# Altium PCB PCB1.PcbDoc (part 1 of 2)
Units mm, origin at the board's own origin, x right, y up, seen from the top; angles counter-clockwise.
Board outline 103.25 x 34.25 mm, 2 copper layers (Top Layer, Bottom Layer); 292 components, 18 nets, 632 pads, 262 vias.
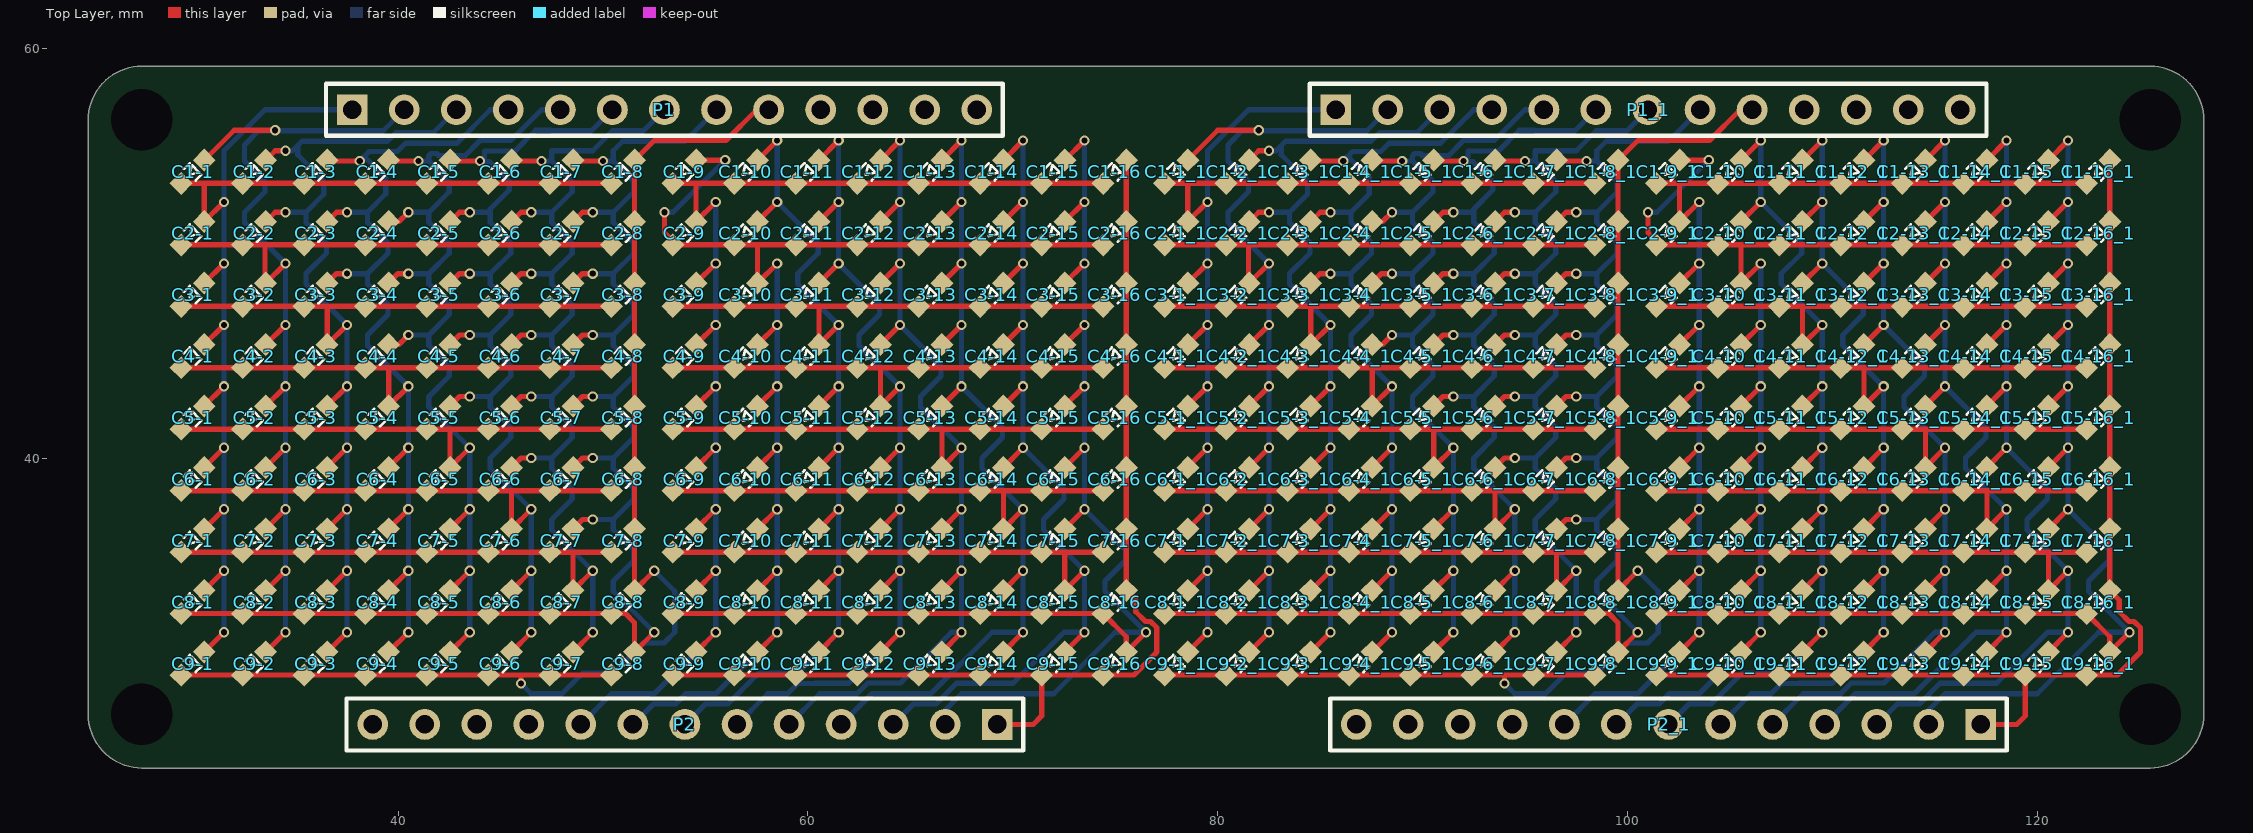
[diagram p0: Top Layer view]
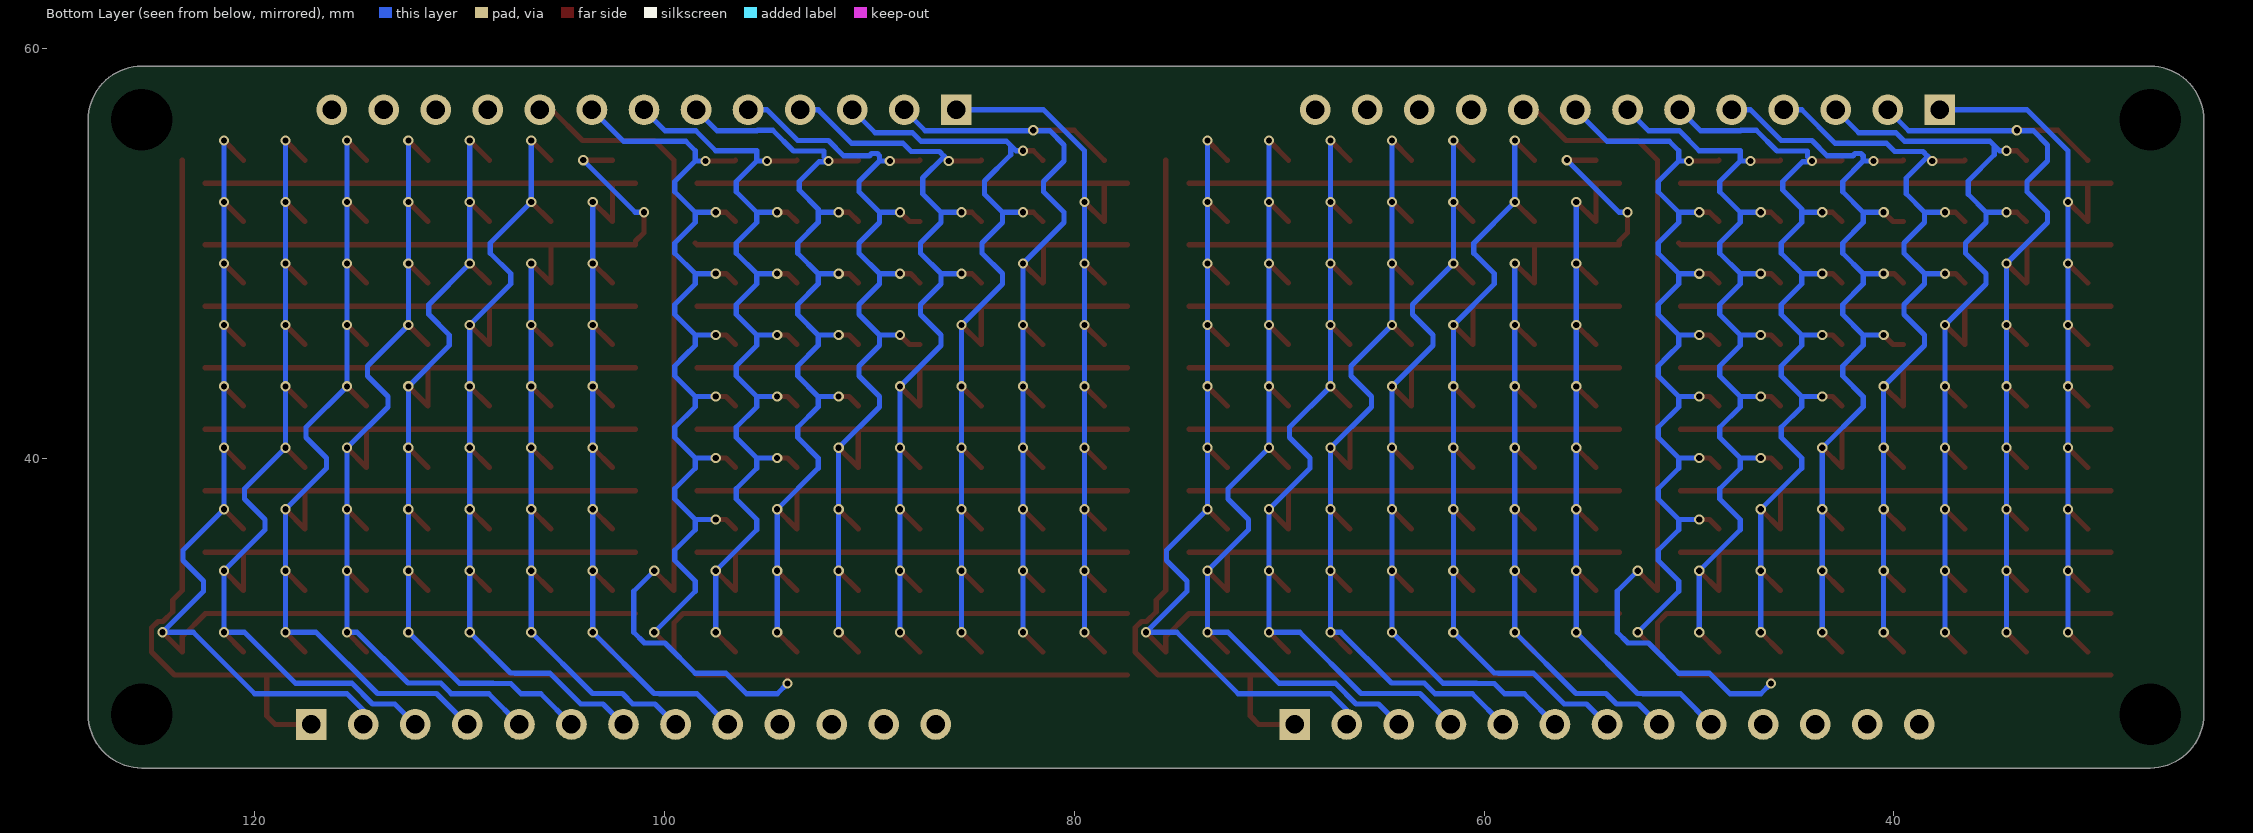
[diagram p1: Bottom Layer view, seen from below]

## Layer stack, top to bottom
Top Solder: solder mask 0.0102, Solder Resist, Dk 3.5
Top Layer: signal copper 0.0356
Dielectric 1: dielectric 0.32, FR-4, Dk 4.8
Bottom Layer: signal copper 0.0356
Bottom Solder: solder mask 0.0102, Solder Resist, Dk 3.5

## Board outline
24.873,27.5 24.873,56.5 cw(c27.5,56.5) 27.5,59.127 125.5,59.127 cw(c125.5,56.5) 128.127,56.5 128.127,27.5 cw(c125.5,27.5) 125.5,24.873 27.5,24.873 cw(c27.5,27.5)

## Design rules (kind name [scope] priority, off if disabled: settings)
Clearance [All] p1: gap=0.152 ignorepadtopadclearanceinfootprint=FALSE except(0: Arc-Hole Track-Hole SMDPad-Hole THPad-Hole Via-Hole Fill-Hole Poly-Hole Region-Hole Text-Hole; 0.254: Arc-Arc Arc-Track Track-Track)
ComponentClearance [All] p1: gap=0 collisioncheckmode=3 verticalgap=0.254 showdistances=FALSE
PolygonConnect [All] p1: connectstyle=Relief reliefconductorwidth=0.254 reliefentries=4 polygonreliefangle="90 Angle" airgapwidth=0.254
RoutingVias [All] p1: holewidth=0.3 width=0.5 viastyle="Through Hole" minholewidth=0.3 minwidth=0.5 maxholewidth=0.3 maxwidth=0.5
SolderMaskExpansion [All] p1: expansion=0.102
Width [All] p1: maxlimit=0.254 minlimit=0.254 preferedwidth=0.254
29 further rules are at their usual default settings.

## Classes and differential pairs
component class Sheet1: C1-1 C1-2 C1-3 C1-4 C1-5 C1-6 C1-7 C1-8 C1-9 C1-10 C1-11 C1-12 C1-13 C1-14 C1-15 C1-16 C2-1 C2-2 C2-3 C2-4 C2-5 C2-6 C2-7 C2-8 C2-9 C2-10 C2-11 C2-12 C2-13 C2-14 C2-15 C2-16 C3-1 C3-2 C3-3 C3-4 C3-5 C3-6 C3-7 C3-8 C3-9 C3-10 C3-11 C3-12 C3-13 C3-14 C3-15 C3-16 C4-1 C4-2 C4-3 C4-4 C4-5 C4-6 C4-7 C4-8 C4-9 C4-10 C4-11 C4-12 C4-13 C4-14 C4-15 C4-16 C5-1 C5-2 C5-3 C5-4 C5-5 C5-6 C5-7 C5-8 C5-9 C5-10 C5-11 C5-12 C5-13 C5-14 C5-15 C5-16 C6-1 C6-2 C6-3 C6-4 C6-5 C6-6 C6-7 C6-8 C6-9 C6-10 C6-11 C6-12 C6-13 C6-14 C6-15 C6-16 C7-1 C7-2 C7-3 C7-4 C7-5 C7-6 C7-7 C7-8 C7-9 C7-10 C7-11 C7-12 C7-13 C7-14 C7-15 C7-16 C8-1 C8-2 C8-3 C8-4 C8-5 C8-6 C8-7 C8-8 C8-9 C8-10 C8-11 C8-12 C8-13 C8-14 C8-15 C8-16 C9-1 C9-2 C9-3 C9-4 C9-5 C9-6 C9-7 C9-8 C9-9 C9-10 C9-11 C9-12 C9-13 C9-14 C9-15 C9-16 P1 P2

## Components (designator, comment, footprint, x,y, rotation, side; value= is the part's Value field where it differs from the comment)
C1-1 "LED" "LED 0603(2)" 30,54 r225 bottom
C1-1_1 "LED" "LED 0603(2)" 78,54 r225 bottom (schematic designator C1-1)
C1-2 "LED" "LED 0603(2)" 33,54 r225 bottom
C1-2_1 "LED" "LED 0603(2)" 81,54 r225 bottom (schematic designator C1-2)
C1-3 "LED" "LED 0603(2)" 36,54 r225 bottom
C1-3_1 "LED" "LED 0603(2)" 84,54 r225 bottom (schematic designator C1-3)
C1-4 "LED" "LED 0603(2)" 39,54 r225 bottom
C1-4_1 "LED" "LED 0603(2)" 87,54 r225 bottom (schematic designator C1-4)
C1-5 "LED" "LED 0603(2)" 42,54 r225 bottom
C1-5_1 "LED" "LED 0603(2)" 90,54 r225 bottom (schematic designator C1-5)
C1-6 "LED" "LED 0603(2)" 45,54 r225 bottom
C1-6_1 "LED" "LED 0603(2)" 93,54 r225 bottom (schematic designator C1-6)
C1-7 "LED" "LED 0603(2)" 48,54 r225 bottom
C1-7_1 "LED" "LED 0603(2)" 96,54 r225 bottom (schematic designator C1-7)
C1-8 "LED" "LED 0603(2)" 51,54 r225 bottom
C1-8_1 "LED" "LED 0603(2)" 99,54 r225 bottom (schematic designator C1-8)
C1-9 "LED" "LED 0603(2)" 54,54 r225 bottom
C1-9_1 "LED" "LED 0603(2)" 102,54 r225 bottom (schematic designator C1-9)
C1-10 "LED" "LED 0603(2)" 57,54 r225 bottom
C1-10_1 "LED" "LED 0603(2)" 105,54 r225 bottom (schematic designator C1-10)
C1-11 "LED" "LED 0603(2)" 60,54 r225 bottom
C1-11_1 "LED" "LED 0603(2)" 108,54 r225 bottom (schematic designator C1-11)
C1-12 "LED" "LED 0603(2)" 63,54 r225 bottom
C1-12_1 "LED" "LED 0603(2)" 111,54 r225 bottom (schematic designator C1-12)
C1-13 "LED" "LED 0603(2)" 66,54 r225 bottom
C1-13_1 "LED" "LED 0603(2)" 114,54 r225 bottom (schematic designator C1-13)
C1-14 "LED" "LED 0603(2)" 69,54 r225 bottom
C1-14_1 "LED" "LED 0603(2)" 117,54 r225 bottom (schematic designator C1-14)
C1-15 "LED" "LED 0603(2)" 72,54 r225 bottom
C1-15_1 "LED" "LED 0603(2)" 120,54 r225 bottom (schematic designator C1-15)
C1-16 "LED" "LED 0603(2)" 75,54 r225 bottom
C1-16_1 "LED" "LED 0603(2)" 123,54 r225 bottom (schematic designator C1-16)
C2-1 "LED" "LED 0603(2)" 30,51 r225 bottom
C2-1_1 "LED" "LED 0603(2)" 78,51 r225 bottom (schematic designator C2-1)
C2-2 "LED" "LED 0603(2)" 33,51 r225 bottom
C2-2_1 "LED" "LED 0603(2)" 81,51 r225 bottom (schematic designator C2-2)
C2-3 "LED" "LED 0603(2)" 36,51 r225 bottom
C2-3_1 "LED" "LED 0603(2)" 84,51 r225 bottom (schematic designator C2-3)
C2-4 "LED" "LED 0603(2)" 39,51 r225 bottom
C2-4_1 "LED" "LED 0603(2)" 87,51 r225 bottom (schematic designator C2-4)
C2-5 "LED" "LED 0603(2)" 42,51 r225 bottom
C2-5_1 "LED" "LED 0603(2)" 90,51 r225 bottom (schematic designator C2-5)
C2-6 "LED" "LED 0603(2)" 45,51 r225 bottom
C2-6_1 "LED" "LED 0603(2)" 93,51 r225 bottom (schematic designator C2-6)
C2-7 "LED" "LED 0603(2)" 48,51 r225 bottom
C2-7_1 "LED" "LED 0603(2)" 96,51 r225 bottom (schematic designator C2-7)
C2-8 "LED" "LED 0603(2)" 51,51 r225 bottom
C2-8_1 "LED" "LED 0603(2)" 99,51 r225 bottom (schematic designator C2-8)
C2-9 "LED" "LED 0603(2)" 54,51 r225 bottom
C2-9_1 "LED" "LED 0603(2)" 102,51 r225 bottom (schematic designator C2-9)
C2-10 "LED" "LED 0603(2)" 57,51 r225 bottom
C2-10_1 "LED" "LED 0603(2)" 105,51 r225 bottom (schematic designator C2-10)
C2-11 "LED" "LED 0603(2)" 60,51 r225 bottom
C2-11_1 "LED" "LED 0603(2)" 108,51 r225 bottom (schematic designator C2-11)
C2-12 "LED" "LED 0603(2)" 63,51 r225 bottom
C2-12_1 "LED" "LED 0603(2)" 111,51 r225 bottom (schematic designator C2-12)
C2-13 "LED" "LED 0603(2)" 66,51 r225 bottom
C2-13_1 "LED" "LED 0603(2)" 114,51 r225 bottom (schematic designator C2-13)
C2-14 "LED" "LED 0603(2)" 69,51 r225 bottom
C2-14_1 "LED" "LED 0603(2)" 117,51 r225 bottom (schematic designator C2-14)
C2-15 "LED" "LED 0603(2)" 72,51 r225 bottom
C2-15_1 "LED" "LED 0603(2)" 120,51 r225 bottom (schematic designator C2-15)
C2-16 "LED" "LED 0603(2)" 75,51 r225 bottom
C2-16_1 "LED" "LED 0603(2)" 123,51 r225 bottom (schematic designator C2-16)
C3-1 "LED" "LED 0603(2)" 30,48 r225 bottom
C3-1_1 "LED" "LED 0603(2)" 78,48 r225 bottom (schematic designator C3-1)
C3-2 "LED" "LED 0603(2)" 33,48 r225 bottom
C3-2_1 "LED" "LED 0603(2)" 81,48 r225 bottom (schematic designator C3-2)
C3-3 "LED" "LED 0603(2)" 36,48 r225 bottom
C3-3_1 "LED" "LED 0603(2)" 84,48 r225 bottom (schematic designator C3-3)
C3-4 "LED" "LED 0603(2)" 39,48 r225 bottom
C3-4_1 "LED" "LED 0603(2)" 87,48 r225 bottom (schematic designator C3-4)
C3-5 "LED" "LED 0603(2)" 42,48 r225 bottom
C3-5_1 "LED" "LED 0603(2)" 90,48 r225 bottom (schematic designator C3-5)
C3-6 "LED" "LED 0603(2)" 45,48 r225 bottom
C3-6_1 "LED" "LED 0603(2)" 93,48 r225 bottom (schematic designator C3-6)
C3-7 "LED" "LED 0603(2)" 48,48 r225 bottom
C3-7_1 "LED" "LED 0603(2)" 96,48 r225 bottom (schematic designator C3-7)
C3-8 "LED" "LED 0603(2)" 51,48 r225 bottom
C3-8_1 "LED" "LED 0603(2)" 99,48 r225 bottom (schematic designator C3-8)
C3-9 "LED" "LED 0603(2)" 54,48 r225 bottom
C3-9_1 "LED" "LED 0603(2)" 102,48 r225 bottom (schematic designator C3-9)
C3-10 "LED" "LED 0603(2)" 57,48 r225 bottom
C3-10_1 "LED" "LED 0603(2)" 105,48 r225 bottom (schematic designator C3-10)
C3-11 "LED" "LED 0603(2)" 60,48 r225 bottom
C3-11_1 "LED" "LED 0603(2)" 108,48 r225 bottom (schematic designator C3-11)
C3-12 "LED" "LED 0603(2)" 63,48 r225 bottom
C3-12_1 "LED" "LED 0603(2)" 111,48 r225 bottom (schematic designator C3-12)
C3-13 "LED" "LED 0603(2)" 66,48 r225 bottom
C3-13_1 "LED" "LED 0603(2)" 114,48 r225 bottom (schematic designator C3-13)
C3-14 "LED" "LED 0603(2)" 69,48 r225 bottom
C3-14_1 "LED" "LED 0603(2)" 117,48 r225 bottom (schematic designator C3-14)
C3-15 "LED" "LED 0603(2)" 72,48 r225 bottom
C3-15_1 "LED" "LED 0603(2)" 120,48 r225 bottom (schematic designator C3-15)
C3-16 "LED" "LED 0603(2)" 75,48 r225 bottom
C3-16_1 "LED" "LED 0603(2)" 123,48 r225 bottom (schematic designator C3-16)
C4-1 "LED" "LED 0603(2)" 30,45 r225 bottom
C4-1_1 "LED" "LED 0603(2)" 78,45 r225 bottom (schematic designator C4-1)
C4-2 "LED" "LED 0603(2)" 33,45 r225 bottom
C4-2_1 "LED" "LED 0603(2)" 81,45 r225 bottom (schematic designator C4-2)
C4-3 "LED" "LED 0603(2)" 36,45 r225 bottom
C4-3_1 "LED" "LED 0603(2)" 84,45 r225 bottom (schematic designator C4-3)
C4-4 "LED" "LED 0603(2)" 39,45 r225 bottom
C4-4_1 "LED" "LED 0603(2)" 87,45 r225 bottom (schematic designator C4-4)
C4-5 "LED" "LED 0603(2)" 42,45 r225 bottom
C4-5_1 "LED" "LED 0603(2)" 90,45 r225 bottom (schematic designator C4-5)
C4-6 "LED" "LED 0603(2)" 45,45 r225 bottom
C4-6_1 "LED" "LED 0603(2)" 93,45 r225 bottom (schematic designator C4-6)
C4-7 "LED" "LED 0603(2)" 48,45 r225 bottom
C4-7_1 "LED" "LED 0603(2)" 96,45 r225 bottom (schematic designator C4-7)
C4-8 "LED" "LED 0603(2)" 51,45 r225 bottom
C4-8_1 "LED" "LED 0603(2)" 99,45 r225 bottom (schematic designator C4-8)
C4-9 "LED" "LED 0603(2)" 54,45 r225 bottom
C4-9_1 "LED" "LED 0603(2)" 102,45 r225 bottom (schematic designator C4-9)
C4-10 "LED" "LED 0603(2)" 57,45 r225 bottom
C4-10_1 "LED" "LED 0603(2)" 105,45 r225 bottom (schematic designator C4-10)
C4-11 "LED" "LED 0603(2)" 60,45 r225 bottom
C4-11_1 "LED" "LED 0603(2)" 108,45 r225 bottom (schematic designator C4-11)
C4-12 "LED" "LED 0603(2)" 63,45 r225 bottom
C4-12_1 "LED" "LED 0603(2)" 111,45 r225 bottom (schematic designator C4-12)
C4-13 "LED" "LED 0603(2)" 66,45 r225 bottom
C4-13_1 "LED" "LED 0603(2)" 114,45 r225 bottom (schematic designator C4-13)
C4-14 "LED" "LED 0603(2)" 69,45 r225 bottom
C4-14_1 "LED" "LED 0603(2)" 117,45 r225 bottom (schematic designator C4-14)
C4-15 "LED" "LED 0603(2)" 72,45 r225 bottom
C4-15_1 "LED" "LED 0603(2)" 120,45 r225 bottom (schematic designator C4-15)
C4-16 "LED" "LED 0603(2)" 75,45 r225 bottom
C4-16_1 "LED" "LED 0603(2)" 123,45 r225 bottom (schematic designator C4-16)
C5-1 "LED" "LED 0603(2)" 30,42 r225 bottom
C5-1_1 "LED" "LED 0603(2)" 78,42 r225 bottom (schematic designator C5-1)
C5-2 "LED" "LED 0603(2)" 33,42 r225 bottom
C5-2_1 "LED" "LED 0603(2)" 81,42 r225 bottom (schematic designator C5-2)
C5-3 "LED" "LED 0603(2)" 36,42 r225 bottom
C5-3_1 "LED" "LED 0603(2)" 84,42 r225 bottom (schematic designator C5-3)
C5-4 "LED" "LED 0603(2)" 39,42 r225 bottom
C5-4_1 "LED" "LED 0603(2)" 87,42 r225 bottom (schematic designator C5-4)
C5-5 "LED" "LED 0603(2)" 42,42 r225 bottom
C5-5_1 "LED" "LED 0603(2)" 90,42 r225 bottom (schematic designator C5-5)
C5-6 "LED" "LED 0603(2)" 45,42 r225 bottom
C5-6_1 "LED" "LED 0603(2)" 93,42 r225 bottom (schematic designator C5-6)
C5-7 "LED" "LED 0603(2)" 48,42 r225 bottom
C5-7_1 "LED" "LED 0603(2)" 96,42 r225 bottom (schematic designator C5-7)
C5-8 "LED" "LED 0603(2)" 51,42 r225 bottom
C5-8_1 "LED" "LED 0603(2)" 99,42 r225 bottom (schematic designator C5-8)
C5-9 "LED" "LED 0603(2)" 54,42 r225 bottom
C5-9_1 "LED" "LED 0603(2)" 102,42 r225 bottom (schematic designator C5-9)
C5-10 "LED" "LED 0603(2)" 57,42 r225 bottom
C5-10_1 "LED" "LED 0603(2)" 105,42 r225 bottom (schematic designator C5-10)
C5-11 "LED" "LED 0603(2)" 60,42 r225 bottom
C5-11_1 "LED" "LED 0603(2)" 108,42 r225 bottom (schematic designator C5-11)
C5-12 "LED" "LED 0603(2)" 63,42 r225 bottom
C5-12_1 "LED" "LED 0603(2)" 111,42 r225 bottom (schematic designator C5-12)
C5-13 "LED" "LED 0603(2)" 66,42 r225 bottom
C5-13_1 "LED" "LED 0603(2)" 114,42 r225 bottom (schematic designator C5-13)
C5-14 "LED" "LED 0603(2)" 69,42 r225 bottom
C5-14_1 "LED" "LED 0603(2)" 117,42 r225 bottom (schematic designator C5-14)
C5-15 "LED" "LED 0603(2)" 72,42 r225 bottom
C5-15_1 "LED" "LED 0603(2)" 120,42 r225 bottom (schematic designator C5-15)
C5-16 "LED" "LED 0603(2)" 75,42 r225 bottom
C5-16_1 "LED" "LED 0603(2)" 123,42 r225 bottom (schematic designator C5-16)
C6-1 "LED" "LED 0603(2)" 30,39 r225 bottom
C6-1_1 "LED" "LED 0603(2)" 78,39 r225 bottom (schematic designator C6-1)
C6-2 "LED" "LED 0603(2)" 33,39 r225 bottom
C6-2_1 "LED" "LED 0603(2)" 81,39 r225 bottom (schematic designator C6-2)
C6-3 "LED" "LED 0603(2)" 36,39 r225 bottom
C6-3_1 "LED" "LED 0603(2)" 84,39 r225 bottom (schematic designator C6-3)
C6-4 "LED" "LED 0603(2)" 39,39 r225 bottom
C6-4_1 "LED" "LED 0603(2)" 87,39 r225 bottom (schematic designator C6-4)
C6-5 "LED" "LED 0603(2)" 42,39 r225 bottom
C6-5_1 "LED" "LED 0603(2)" 90,39 r225 bottom (schematic designator C6-5)
C6-6 "LED" "LED 0603(2)" 45,39 r225 bottom
C6-6_1 "LED" "LED 0603(2)" 93,39 r225 bottom (schematic designator C6-6)
C6-7 "LED" "LED 0603(2)" 48,39 r225 bottom
C6-7_1 "LED" "LED 0603(2)" 96,39 r225 bottom (schematic designator C6-7)
C6-8 "LED" "LED 0603(2)" 51,39 r225 bottom
C6-8_1 "LED" "LED 0603(2)" 99,39 r225 bottom (schematic designator C6-8)
C6-9 "LED" "LED 0603(2)" 54,39 r225 bottom
C6-9_1 "LED" "LED 0603(2)" 102,39 r225 bottom (schematic designator C6-9)
C6-10 "LED" "LED 0603(2)" 57,39 r225 bottom
C6-10_1 "LED" "LED 0603(2)" 105,39 r225 bottom (schematic designator C6-10)
C6-11 "LED" "LED 0603(2)" 60,39 r225 bottom
C6-11_1 "LED" "LED 0603(2)" 108,39 r225 bottom (schematic designator C6-11)
C6-12 "LED" "LED 0603(2)" 63,39 r225 bottom
C6-12_1 "LED" "LED 0603(2)" 111,39 r225 bottom (schematic designator C6-12)
C6-13 "LED" "LED 0603(2)" 66,39 r225 bottom
C6-13_1 "LED" "LED 0603(2)" 114,39 r225 bottom (schematic designator C6-13)
C6-14 "LED" "LED 0603(2)" 69,39 r225 bottom
C6-14_1 "LED" "LED 0603(2)" 117,39 r225 bottom (schematic designator C6-14)
C6-15 "LED" "LED 0603(2)" 72,39 r225 bottom
C6-15_1 "LED" "LED 0603(2)" 120,39 r225 bottom (schematic designator C6-15)
C6-16 "LED" "LED 0603(2)" 75,39 r225 bottom
C6-16_1 "LED" "LED 0603(2)" 123,39 r225 bottom (schematic designator C6-16)
C7-1 "LED" "LED 0603(2)" 30,36 r225 bottom
C7-1_1 "LED" "LED 0603(2)" 78,36 r225 bottom (schematic designator C7-1)
C7-2 "LED" "LED 0603(2)" 33,36 r225 bottom
C7-2_1 "LED" "LED 0603(2)" 81,36 r225 bottom (schematic designator C7-2)
C7-3 "LED" "LED 0603(2)" 36,36 r225 bottom
C7-3_1 "LED" "LED 0603(2)" 84,36 r225 bottom (schematic designator C7-3)
C7-4 "LED" "LED 0603(2)" 39,36 r225 bottom
C7-4_1 "LED" "LED 0603(2)" 87,36 r225 bottom (schematic designator C7-4)
C7-5 "LED" "LED 0603(2)" 42,36 r225 bottom
C7-5_1 "LED" "LED 0603(2)" 90,36 r225 bottom (schematic designator C7-5)
C7-6 "LED" "LED 0603(2)" 45,36 r225 bottom
C7-6_1 "LED" "LED 0603(2)" 93,36 r225 bottom (schematic designator C7-6)
C7-7 "LED" "LED 0603(2)" 48,36 r225 bottom
C7-7_1 "LED" "LED 0603(2)" 96,36 r225 bottom (schematic designator C7-7)
C7-8 "LED" "LED 0603(2)" 51,36 r225 bottom
C7-8_1 "LED" "LED 0603(2)" 99,36 r225 bottom (schematic designator C7-8)
C7-9 "LED" "LED 0603(2)" 54,36 r225 bottom
C7-9_1 "LED" "LED 0603(2)" 102,36 r225 bottom (schematic designator C7-9)
C7-10 "LED" "LED 0603(2)" 57,36 r225 bottom
C7-10_1 "LED" "LED 0603(2)" 105,36 r225 bottom (schematic designator C7-10)
C7-11 "LED" "LED 0603(2)" 60,36 r225 bottom
C7-11_1 "LED" "LED 0603(2)" 108,36 r225 bottom (schematic designator C7-11)
C7-12 "LED" "LED 0603(2)" 63,36 r225 bottom
C7-12_1 "LED" "LED 0603(2)" 111,36 r225 bottom (schematic designator C7-12)
C7-13 "LED" "LED 0603(2)" 66,36 r225 bottom
C7-13_1 "LED" "LED 0603(2)" 114,36 r225 bottom (schematic designator C7-13)
C7-14 "LED" "LED 0603(2)" 69,36 r225 bottom
C7-14_1 "LED" "LED 0603(2)" 117,36 r225 bottom (schematic designator C7-14)
C7-15 "LED" "LED 0603(2)" 72,36 r225 bottom
C7-15_1 "LED" "LED 0603(2)" 120,36 r225 bottom (schematic designator C7-15)
C7-16 "LED" "LED 0603(2)" 75,36 r225 bottom
C7-16_1 "LED" "LED 0603(2)" 123,36 r225 bottom (schematic designator C7-16)
C8-1 "LED" "LED 0603(2)" 30,33 r225 bottom
C8-1_1 "LED" "LED 0603(2)" 78,33 r225 bottom (schematic designator C8-1)
C8-2 "LED" "LED 0603(2)" 33,33 r225 bottom
C8-2_1 "LED" "LED 0603(2)" 81,33 r225 bottom (schematic designator C8-2)
C8-3 "LED" "LED 0603(2)" 36,33 r225 bottom
C8-3_1 "LED" "LED 0603(2)" 84,33 r225 bottom (schematic designator C8-3)
C8-4 "LED" "LED 0603(2)" 39,33 r225 bottom
C8-4_1 "LED" "LED 0603(2)" 87,33 r225 bottom (schematic designator C8-4)
C8-5 "LED" "LED 0603(2)" 42,33 r225 bottom
C8-5_1 "LED" "LED 0603(2)" 90,33 r225 bottom (schematic designator C8-5)
C8-6 "LED" "LED 0603(2)" 45,33 r225 bottom
C8-6_1 "LED" "LED 0603(2)" 93,33 r225 bottom (schematic designator C8-6)
C8-7 "LED" "LED 0603(2)" 48,33 r225 bottom
C8-7_1 "LED" "LED 0603(2)" 96,33 r225 bottom (schematic designator C8-7)
C8-8 "LED" "LED 0603(2)" 51,33 r225 bottom
C8-8_1 "LED" "LED 0603(2)" 99,33 r225 bottom (schematic designator C8-8)
C8-9 "LED" "LED 0603(2)" 54,33 r225 bottom
C8-9_1 "LED" "LED 0603(2)" 102,33 r225 bottom (schematic designator C8-9)
C8-10 "LED" "LED 0603(2)" 57,33 r225 bottom
C8-10_1 "LED" "LED 0603(2)" 105,33 r225 bottom (schematic designator C8-10)
C8-11 "LED" "LED 0603(2)" 60,33 r225 bottom
C8-11_1 "LED" "LED 0603(2)" 108,33 r225 bottom (schematic designator C8-11)
C8-12 "LED" "LED 0603(2)" 63,33 r225 bottom
C8-12_1 "LED" "LED 0603(2)" 111,33 r225 bottom (schematic designator C8-12)
C8-13 "LED" "LED 0603(2)" 66,33 r225 bottom
C8-13_1 "LED" "LED 0603(2)" 114,33 r225 bottom (schematic designator C8-13)
C8-14 "LED" "LED 0603(2)" 69,33 r225 bottom
C8-14_1 "LED" "LED 0603(2)" 117,33 r225 bottom (schematic designator C8-14)
C8-15 "LED" "LED 0603(2)" 72,33 r225 bottom
C8-15_1 "LED" "LED 0603(2)" 120,33 r225 bottom (schematic designator C8-15)
C8-16 "LED" "LED 0603(2)" 75,33 r225 bottom
C8-16_1 "LED" "LED 0603(2)" 123,33 r225 bottom (schematic designator C8-16)
C9-1 "LED" "LED 0603(2)" 30,30 r225 bottom
C9-1_1 "LED" "LED 0603(2)" 78,30 r225 bottom (schematic designator C9-1)
C9-2 "LED" "LED 0603(2)" 33,30 r225 bottom
C9-2_1 "LED" "LED 0603(2)" 81,30 r225 bottom (schematic designator C9-2)
C9-3 "LED" "LED 0603(2)" 36,30 r225 bottom
C9-3_1 "LED" "LED 0603(2)" 84,30 r225 bottom (schematic designator C9-3)
C9-4 "LED" "LED 0603(2)" 39,30 r225 bottom
C9-4_1 "LED" "LED 0603(2)" 87,30 r225 bottom (schematic designator C9-4)
C9-5 "LED" "LED 0603(2)" 42,30 r225 bottom
C9-5_1 "LED" "LED 0603(2)" 90,30 r225 bottom (schematic designator C9-5)
C9-6 "LED" "LED 0603(2)" 45,30 r225 bottom
C9-6_1 "LED" "LED 0603(2)" 93,30 r225 bottom (schematic designator C9-6)
C9-7 "LED" "LED 0603(2)" 48,30 r225 bottom
C9-7_1 "LED" "LED 0603(2)" 96,30 r225 bottom (schematic designator C9-7)
C9-8 "LED" "LED 0603(2)" 51,30 r225 bottom
C9-8_1 "LED" "LED 0603(2)" 99,30 r225 bottom (schematic designator C9-8)
C9-9 "LED" "LED 0603(2)" 54,30 r225 bottom
C9-9_1 "LED" "LED 0603(2)" 102,30 r225 bottom (schematic designator C9-9)
C9-10 "LED" "LED 0603(2)" 57,30 r225 bottom
C9-10_1 "LED" "LED 0603(2)" 105,30 r225 bottom (schematic designator C9-10)
C9-11 "LED" "LED 0603(2)" 60,30 r225 bottom
C9-11_1 "LED" "LED 0603(2)" 108,30 r225 bottom (schematic designator C9-11)
C9-12 "LED" "LED 0603(2)" 63,30 r225 bottom
C9-12_1 "LED" "LED 0603(2)" 111,30 r225 bottom (schematic designator C9-12)
C9-13 "LED" "LED 0603(2)" 66,30 r225 bottom
C9-13_1 "LED" "LED 0603(2)" 114,30 r225 bottom (schematic designator C9-13)
C9-14 "LED" "LED 0603(2)" 69,30 r225 bottom
C9-14_1 "LED" "LED 0603(2)" 117,30 r225 bottom (schematic designator C9-14)
C9-15 "LED" "LED 0603(2)" 72,30 r225 bottom
C9-15_1 "LED" "LED 0603(2)" 120,30 r225 bottom (schematic designator C9-15)
C9-16 "LED" "LED 0603(2)" 75,30 r225 bottom
C9-16_1 "LED" "LED 0603(2)" 123,30 r225 bottom (schematic designator C9-16)
P1 "Header 13" HDR1X13 37.76,57 r0 top
P1_1 "Header 13" HDR1X13 85.76,57 r0 top (schematic designator P1)
P2 "Header 13" HDR1X13 69.24,27 r180 top
P2_1 "Header 13" HDR1X13 117.24,27 r180 top (schematic designator P2)

## Footprints (in the part's own frame and the unit in brackets; to place one, negate y for a bottom-side part, rotate by r counter-clockwise, add the part's x,y. Pads: shape width x height; smd on the part's side, far side on the other; paste and mask are expansions set on the pad)
HDR1X13 [mm] "Connector; Header; 13 Position"
  rect 1.5x1.5 hole 0.9: 1(0,0)
  round 1.5 hole 0.9: 2(2.54,0) 3(5.08,0) 4(7.62,0) 5(10.16,0) 6(12.7,0) 7(15.24,0) 8(17.78,0) 9(20.32,0) 10(22.86,0) 11(25.4,0) 12(27.94,0) 13(30.48,0)
  silkscreen extent -1.27,-1.27 31.75,1.27
"LED 0603(2)" [mm]
  rect 0.8x0.8 smd far side: 1(-0.762,0) 2(0.838,0)

## Part data
P1 P1_1 P2 P2_1: "Header, 13-Pin", LatestRevisionDate=17-Jul-2002, LatestRevisionNote="Re-released for DXP Platform.", Publisher="Altium Limited"

## Free pads (board coordinates)
  round 0 hole 3: 1(27.5,56.5) 2(125.5,56.5) 3(27.5,27.5) 4(125.5,27.5)

## Via types
v1: diameter 0.5, hole 0.3, Top Layer to Bottom Layer, 262 vias

## Nets (pads, with @x,y where several pads share a name; then routed paths per layer and width w, separated by ;. In a path a pad name is that pad's centre, name@x,y a point inside that pad or via, vN(x,y) a via of type N, cw(c..) or ccw(c..) an arc to the next point about the centre after c; other vN are vias at no path point)
CA1: C1-1.2 C1-2.2 C1-3.2 C1-4.2 C1-5.2 C1-6.2 C1-7.2 C1-8.2 C2-1.1 C3-1.1 C4-1.1 C5-1.1 C6-1.1 C7-1.1 C8-1.1 C9-1.1 P1.1 | length 64.3
  Top Layer w0.254: C1-1.2@29.407,53.407 30.5,53.407 ; C9-1.1@30.539,30.539 v1(31.5,31.5) ; C8-1.1@30.539,33.539 v1(31.5,34.5) ; C7-1.1@30.539,36.539 v1(31.5,37.5) ; C6-1.1@30.539,39.539 v1(31.5,40.5) ; C5-1.1@30.539,42.539 v1(31.5,43.5) ; C4-1.1@30.539,45.539 v1(31.5,46.5) ; C3-1.1@30.539,48.539 v1(31.5,49.5) ; v1(31.5,52.5) C2-1.1@30.539,51.539 30.539,53.369 30.5,53.407 ; C1-8.2@50.407,53.407 C1-7.2@47.407,53.407 C1-6.2@44.407,53.407 C1-5.2@41.407,53.407 C1-4.2@38.407,53.407 C1-3.2@35.407,53.407 C1-2.2@32.407,53.407 30.5,53.407
  Bottom Layer w0.254: v1(31.5,31.5) v1(31.5,34.5) v1(31.5,37.5) v1(31.5,40.5) v1(31.5,43.5) v1(31.5,46.5) v1(31.5,49.5) v1(31.5,52.5) 31.5,55 33.5,57 P1.1@37.76,57
CA2: C1-1.1 C2-1.2 C2-2.2 C2-3.2 C2-4.2 C2-5.2 C2-6.2 C2-7.2 C2-8.2 C3-2.1 C4-2.1 C5-2.1 C6-2.1 C7-2.1 C8-2.1 C9-2.1 P1.2 | length 70.5
  Top Layer w0.254: C2-1.2@29.407,50.407 C2-2.2@32.407,50.407 33.5,50.407 ; C1-1.1@30.539,54.539 32,56 v1(34,56) ; C9-2.1@33.539,30.539 v1(34.5,31.5) ; C8-2.1@33.539,33.539 v1(34.5,34.5) ; C7-2.1@33.539,36.539 v1(34.5,37.5) ; C6-2.1@33.539,39.539 v1(34.5,40.5) ; C5-2.1@33.539,42.539 v1(34.5,43.5) ; C4-2.1@33.539,45.539 v1(34.5,46.5) ; v1(34.5,49.5) C3-2.1@33.539,48.539 33.5,48.578 33.5,50.407 ; C2-8.2@50.5,50.5 C2-8.2@50.407,50.407 C2-7.2@47.407,50.407 C2-6.2@44.407,50.407 C2-5.2@41.407,50.407 C2-4.2@38.407,50.407 C2-3.2@35.407,50.407 33.5,50.407
  Bottom Layer w0.254: v1(34.5,31.5) v1(34.5,34.5) v1(34.5,37.5) v1(34.5,40.5) v1(34.5,43.5) v1(34.5,46.5) v1(34.5,49.5) 32.5,51.5 32.5,52 33.5,53 33.5,53.5 32.5,54.5 32.5,55.282 33.189,55.971 39.271,55.971 P1.2@40.3,57
CA3: C1-2.1 C2-2.1 C3-1.2 C3-2.2 C3-3.2 C3-4.2 C3-5.2 C3-6.2 C3-7.2 C3-8.2 C4-3.1 C5-3.1 C6-3.1 C7-3.1 C8-3.1 C9-3.1 P1.3 | length 69.8
  Top Layer w0.254: C3-1.2@29.407,47.407 C3-2.2@32.407,47.407 C3-3.2@35.407,47.407 36.5,47.407 ; C2-2.1@33.539,51.539 34,52 v1(34.5,52) ; C1-2.1@33.539,54.539 34,55 v1(34.5,55) ; C9-3.1@36.539,30.539 v1(37.5,31.5) ; C8-3.1@36.539,33.539 v1(37.5,34.5) ; C7-3.1@36.539,36.539 v1(37.5,37.5) ; C6-3.1@36.539,39.539 v1(37.5,40.5) ; C5-3.1@36.539,42.539 v1(37.5,43.5) ; v1(37.5,46.5) C4-3.1@36.539,45.539 36.539,47.369 36.5,47.407 ; C3-8.2@50.407,47.407 C3-7.2@47.407,47.407 C3-6.2@44.407,47.407 C3-5.2@41.407,47.407 C3-4.2@38.407,47.407 36.5,47.407
  Bottom Layer w0.254: v1(34.5,52) 35.5,52 ; v1(34.5,55) 34.85,55 35.1,55.25 ; v1(37.5,31.5) v1(37.5,34.5) v1(37.5,37.5) v1(37.5,40.5) v1(37.5,43.5) v1(37.5,46.5) 35.5,48.5 35.5,49 36.5,50 36.5,50.5 35.5,51.5 35.5,52 ; P1.3@42.84,57 41.715,55.875 39.893,55.875 39.481,55.463 35.313,55.463 35.1,55.25 ; 35.1,55.25 35.1,54.8 36.375,53.525 36.375,52.875 35.5,52
CA4: C1-3.1 C2-3.1 C3-3.1 C4-1.2 C4-2.2 C4-3.2 C4-4.2 C4-5.2 C4-6.2 C4-7.2 C4-8.2 C5-4.1 C6-4.1 C7-4.1 C8-4.1 C9-4.1 P1.4 | length 70.4
  Top Layer w0.254: C4-1.2@29.407,44.407 C4-2.2@32.407,44.407 C4-3.2@35.407,44.407 C4-4.2@38.407,44.407 39.5,44.407 ; C3-3.1@36.539,48.539 37,49 v1(37.5,49) ; C2-3.1@36.539,51.539 37,52 v1(37.5,52) ; C1-3.1@36.539,54.539 36.578,54.5 v1(38.125,54.5) ; C9-4.1@39.539,30.539 v1(40.5,31.5) ; C8-4.1@39.539,33.539 v1(40.5,34.5) ; C7-4.1@39.539,36.539 v1(40.5,37.5) ; C6-4.1@39.539,39.539 v1(40.5,40.5) ; v1(40.5,43.5) C5-4.1@39.539,42.539 39.539,44.369 39.5,44.407 ; C4-8.2@50.407,44.407 C4-7.2@47.407,44.407 C4-6.2@44.407,44.407 C4-5.2@41.407,44.407 39.5,44.407
  Bottom Layer w0.254: v1(37.5,49) 38.5,49 ; v1(37.5,52) 38.5,52 ; v1(38.125,54.5) 38.35,54.725 ; v1(40.5,31.5) v1(40.5,34.5) v1(40.5,37.5) v1(40.5,40.5) v1(40.5,43.5) 38.5,45.5 38.5,46 39.5,47 39.5,47.5 38.5,48.5 38.5,49 ; P1.4@45.38,57 44.5,57 42.867,55.367 40.367,55.367 39.955,54.955 38.58,54.955 38.35,54.725 ; 38.35,54.725 39.4,53.675 39.4,52.9 38.5,52 ; 38.5,49 39.5,50 39.5,50.5 38.5,51.5 38.5,52
CA5: C1-4.1 C2-4.1 C3-4.1 C4-4.1 C5-1.2 C5-2.2 C5-3.2 C5-4.2 C5-5.2 C5-6.2 C5-7.2 C5-8.2 C6-5.1 C7-5.1 C8-5.1 C9-5.1 P1.5 | length 71.6
  Top Layer w0.254: C5-1.2@29.407,41.407 C5-2.2@32.407,41.407 C5-3.2@35.407,41.407 C5-4.2@38.407,41.407 C5-5.2@41.407,41.407 42.5,41.407 ; C4-4.1@39.539,45.539 40.039,45.539 v1(40.5,46) ; C3-4.1@39.539,48.539 40,49 v1(40.5,49) ; C2-4.1@39.539,51.539 40.039,51.539 v1(40.5,52) ; C1-4.1@39.539,54.539 39.578,54.5 v1(41,54.5) ; C9-5.1@42.539,30.539 v1(43.5,31.5) ; C8-5.1@42.539,33.539 v1(43.5,34.5) ; C7-5.1@42.539,36.539 v1(43.5,37.5) ; v1(43.5,40.5) C6-5.1@42.539,39.539 42.539,41.369 42.5,41.407 ; C5-8.2@50.407,41.407 C5-7.2@47.407,41.407 C5-6.2@44.407,41.407 42.5,41.407
  Bottom Layer w0.254: v1(40.5,46) 41.5,46 ; v1(40.5,49) 41.5,49 ; v1(40.5,52) 41.5,52 ; v1(41,54.5) 41.5,54.5 ; v1(43.5,31.5) v1(43.5,34.5) v1(43.5,37.5) v1(43.5,40.5) 41.5,42.5 41.5,43 42.5,44 42.5,44.5 41.5,45.5 41.5,46 ; P1.5@47.92,57 47,57 45.5,55.5 44,55.5 43.25,54.75 42,54.75 41.891,54.859 41.609,54.859 41.5,54.75 41.5,54.5 ; 41.5,46 42.5,47 42.5,47.5 41.5,48.5 41.5,49 ; 41.5,49 42.5,50 42.5,50.5 41.5,51.5 41.5,52 ; 41.5,52 42.5,53 42.5,53.5 41.5,54.5
CA6: C1-5.1 C2-5.1 C3-5.1 C4-5.1 C5-5.1 C6-1.2 C6-2.2 C6-3.2 C6-4.2 C6-5.2 C6-6.2 C6-7.2 C6-8.2 C7-6.1 C8-6.1 C9-6.1 P1.6 | length 72.8
  Top Layer w0.254: C6-1.2@29.407,38.407 C6-2.2@32.407,38.407 C6-3.2@35.407,38.407 C6-4.2@38.407,38.407 C6-5.2@41.407,38.407 C6-6.2@44.407,38.407 45.5,38.407 ; C5-5.1@42.539,42.539 43,43 v1(43.5,43) ; C4-5.1@42.539,45.539 43,46 v1(43.5,46) ; C3-5.1@42.539,48.539 43,49 v1(43.5,49) ; C2-5.1@42.539,51.539 43,52 v1(43.5,52) ; C1-5.1@42.539,54.539 42.578,54.5 v1(44,54.5) ; C9-6.1@45.539,30.539 v1(46.5,31.5) ; C8-6.1@45.539,33.539 v1(46.5,34.5) ; v1(46.5,37.5) C7-6.1@45.539,36.539 45.539,38.369 45.5,38.407 ; C6-8.2@50.407,38.407 C6-7.2@47.407,38.407 45.5,38.407
  Bottom Layer w0.254: v1(43.5,43) 44.5,43 ; v1(43.5,46) 44.5,46 ; v1(43.5,49) 44.5,49 ; v1(43.5,52) 44.5,52 ; v1(44,54.5) 44.04,54.46 44.46,54.46 45.421,53.5 45.421,53.079 44.5,52.158 44.5,52 ; 44.21,54.71 44.21,54.992 45.71,54.992 46.718,56 47.465,56 47.494,55.971 49.431,55.971 P1.6@50.46,57 ; v1(46.5,31.5) v1(46.5,34.5) v1(46.5,37.5) 44.5,39.5 44.5,40 45.5,41 45.5,41.5 44.5,42.5 44.5,43 ; 44.5,43 45.5,44 45.5,44.5 44.5,45.5 44.5,46 ; 44.5,46 45.5,47 45.5,47.5 44.5,48.5 44.5,49 ; 44.5,49 45.5,50 45.5,50.5 44.5,51.5 44.5,52
CA7: C1-6.1 C2-6.1 C3-6.1 C4-6.1 C5-6.1 C6-6.1 C7-1.2 C7-2.2 C7-3.2 C7-4.2 C7-5.2 C7-6.2 C7-7.2 C7-8.2 C8-7.1 C9-7.1 P1.7 | length 74
  Top Layer w0.254: C7-1.2@29.407,35.407 C7-2.2@32.407,35.407 C7-3.2@35.407,35.407 C7-4.2@38.407,35.407 C7-5.2@41.407,35.407 C7-6.2@44.407,35.407 C7-7.2@47.407,35.407 48.5,35.407 ; C6-6.1@45.539,39.539 46,40 v1(46.5,40) ; C5-6.1@45.539,42.539 46,43 v1(46.5,43) ; C4-6.1@45.539,45.539 46,46 v1(46.5,46) ; C3-6.1@45.539,48.539 46,49 v1(46.5,49) ; C2-6.1@45.539,51.539 46,52 v1(46.5,52) ; C1-6.1@45.539,54.539 45.578,54.5 v1(47,54.5) ; C9-7.1@48.539,30.539 v1(49.5,31.5) ; v1(49.5,34.5) C8-7.1@48.539,33.539 48.539,35.369 48.5,35.407 ; C7-8.2@50.407,35.407 48.5,35.407
  Bottom Layer w0.254: v1(46.5,40) 47.5,40 ; v1(46.5,43) 47.5,43 ; v1(46.5,46) 47.5,46 ; v1(46.5,49) 47.5,49 ; v1(46.5,52) 47.5,52 ; v1(47,54.5) 47.5,54.5 ; v1(49.5,31.5) v1(49.5,34.5) 47.5,36.5 47.5,37 48.5,38 48.5,38.5 47.5,39.5 47.5,40 ; P1.7@53,57 51.971,55.971 50.471,55.971 49.5,55 47.5,55 47.5,54.5 ; 47.5,40 48.5,41 48.5,41.5 47.5,42.5 47.5,43 ; 47.5,43 48.5,44 48.5,44.5 47.5,45.5 47.5,46 ; 47.5,46 48.5,47 48.5,47.5 47.5,48.5 47.5,49 ; 47.5,49 48.5,50 48.5,50.5 47.5,51.5 47.5,52 ; 47.5,52 48.5,53 48.5,53.5 47.5,54.5